# Altium PCB GPS SIM868-V10-ST-F0.PcbDoc (part 1 of 2)
Units mm, origin at the board's own origin, x right, y up, seen from the top; angles counter-clockwise.
Board outline 43.41 x 89 mm, 2 copper layers (Top Layer, Bottom Layer); 89 components, 73 nets, 330 pads, 120 vias.
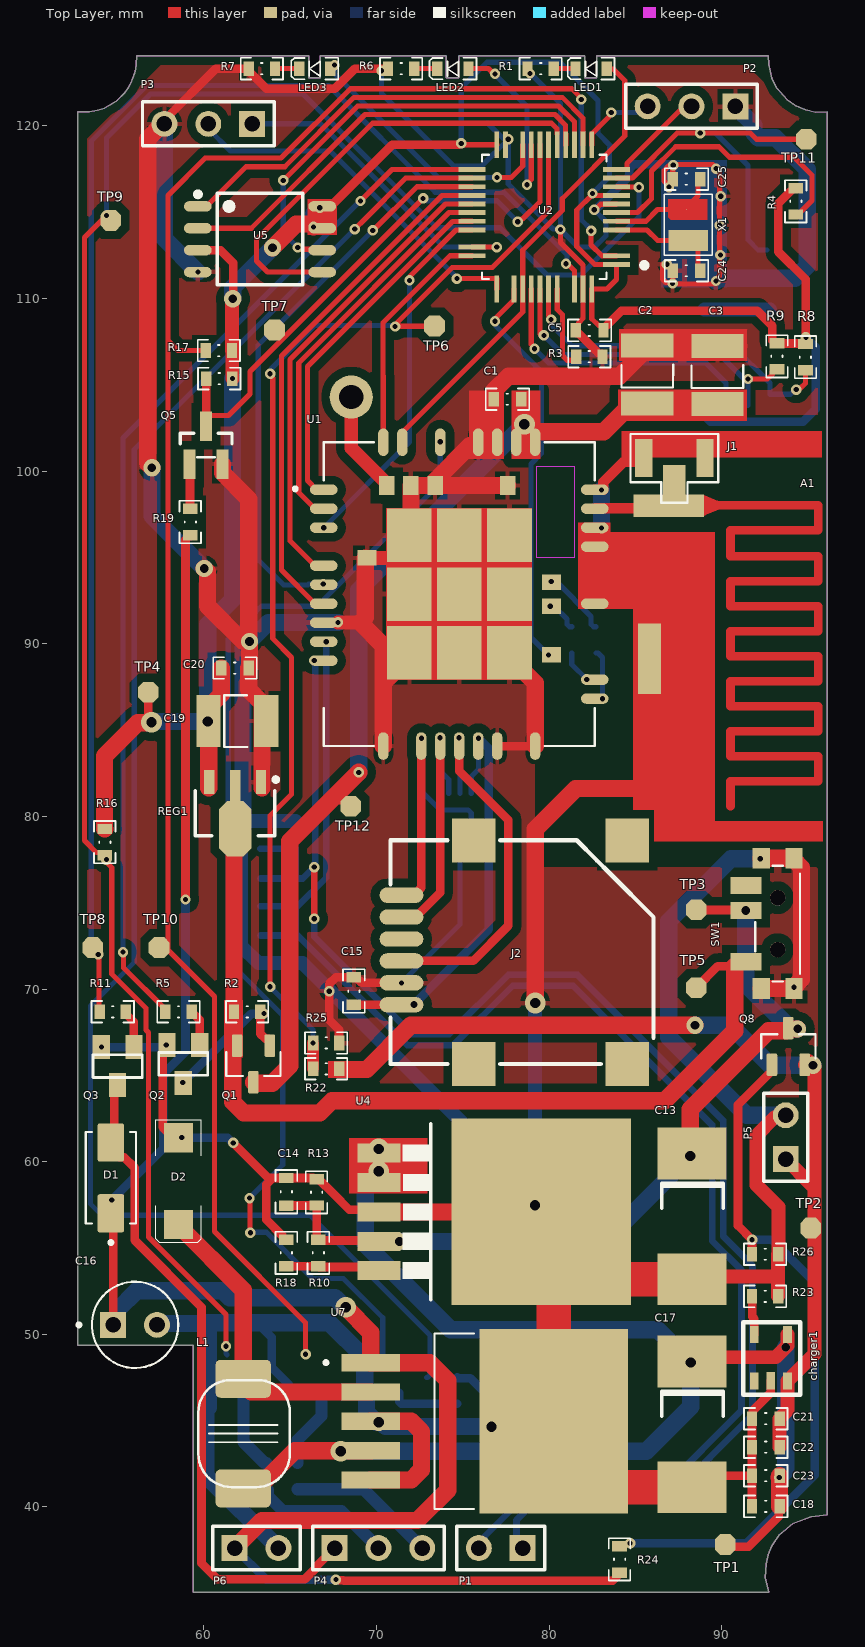
[diagram p0: Top Layer view]
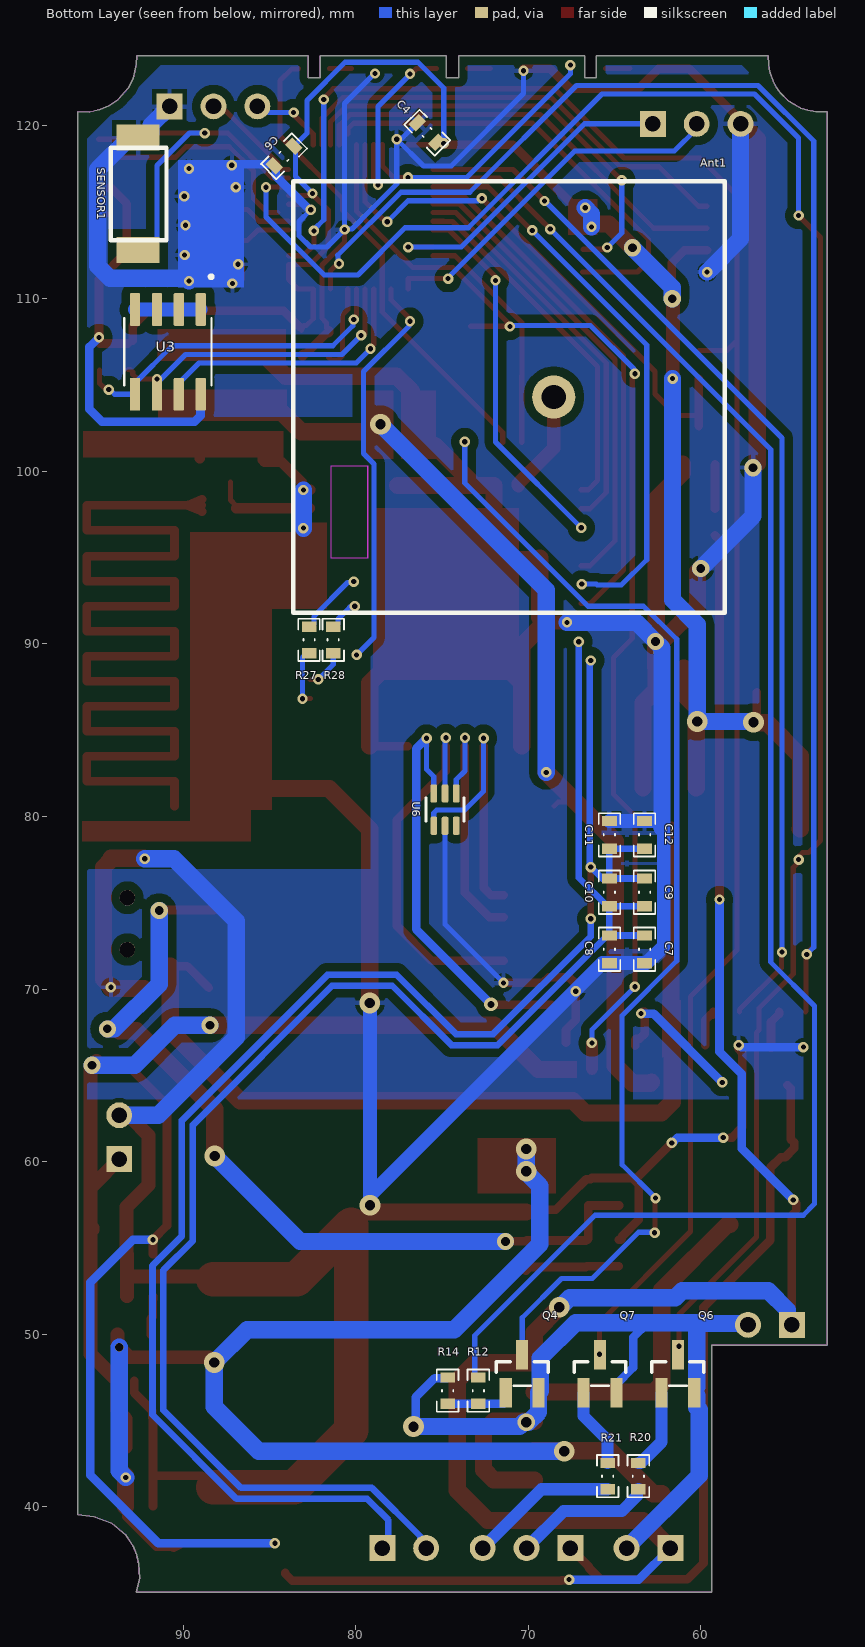
[diagram p1: Bottom Layer view, seen from below]
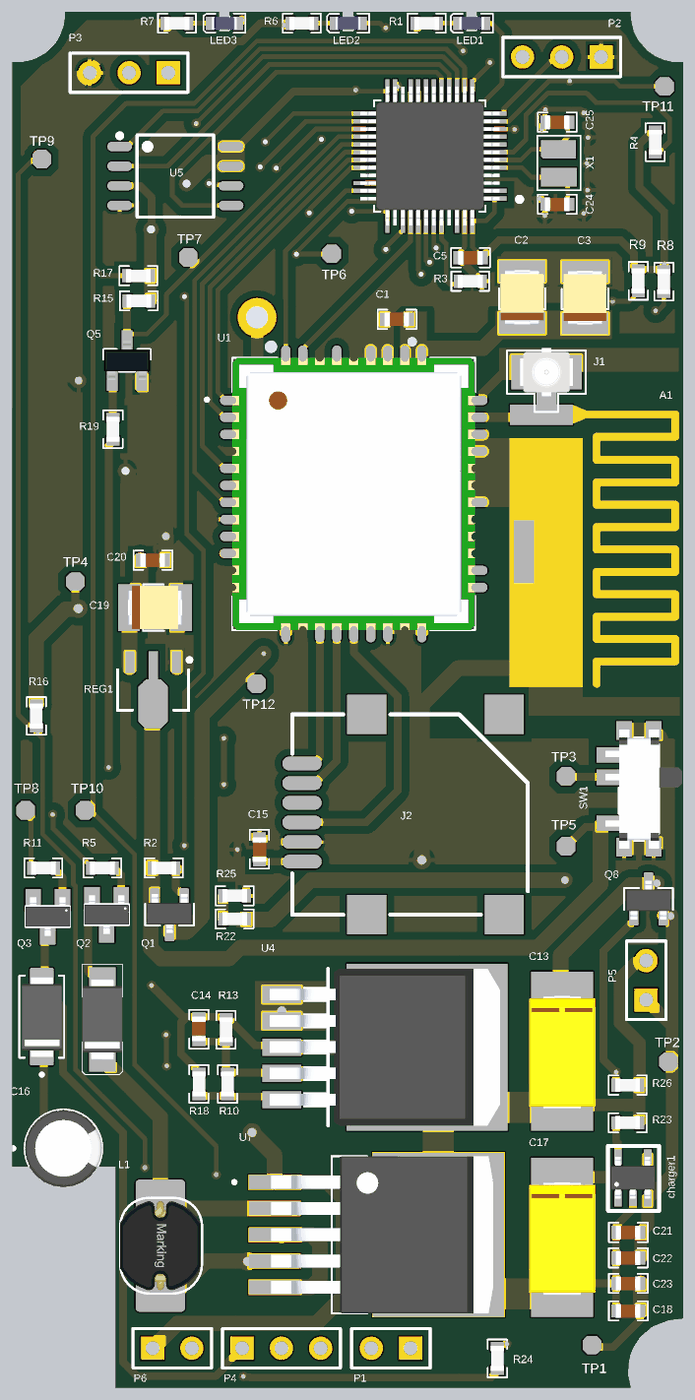
[diagram p3: 3D render of the assembled board from above, using the file's embedded part models]
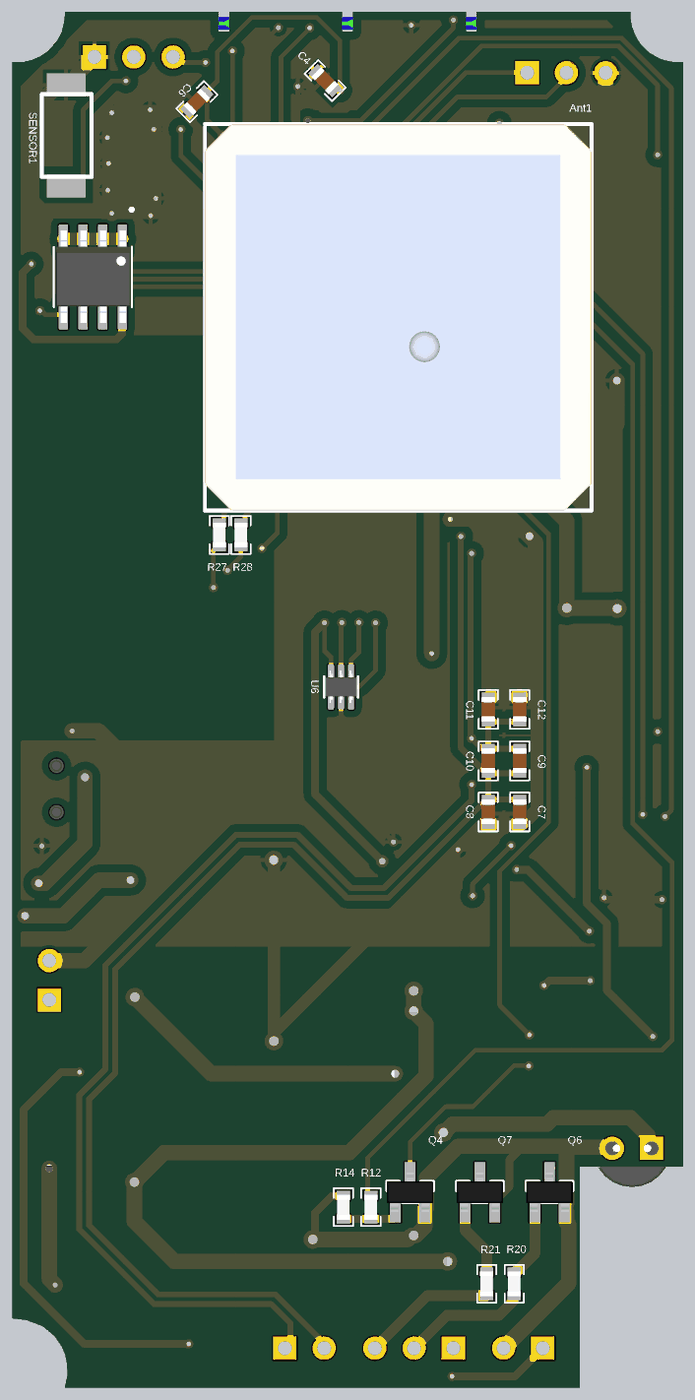
[diagram p4: 3D render of the assembled board from below, using the file's embedded part models]

## Layer stack, top to bottom
Top Solder: solder mask 0.0102, Solder Resist, Dk 3.5
Top Layer: signal copper 0.0356
Dielectric 1: dielectric 0.32, FR-4, Dk 4.8
Bottom Layer: signal copper 0.0356
Bottom Solder: solder mask 0.0102, Solder Resist, Dk 3.5

## Board outline
52.691,49.352 59.383,49.352 59.383,35.06 92.702,35.06 92.522,35.892 92.569,36.692 92.675,37.23 92.899,37.724 93.329,38.373 94.129,39.04 95.173,39.435 96.097,39.546 96.1,120.806 95.416,120.805 94.851,120.933 94.284,121.175 93.778,121.52 93.187,122.194 92.892,122.753 92.712,123.577 92.692,124.052 82.748,124.059 82.748,122.784 82.047,122.784 82.047,124.06 74.746,124.057 74.747,122.784 74.748,122.783 74.047,122.784 74.047,124.058 66.748,124.059 66.747,122.784 66.065,122.784 66.063,124.059 56.098,124.059 56.089,123.572 56.048,123.305 55.999,123.067 55.77,122.477 55.59,122.158 55.385,121.886 54.981,121.493 54.814,121.36 54.23,121.034 53.812,120.897 53.353,120.813 52.699,120.808

## Design rules (kind name [scope] priority, off if disabled: settings)
Clearance [All] p1: gap=0.2 ignorepadtopadclearanceinfootprint=FALSE
DiffPairsRouting [All] p1: maxlimit=0.254 minlimit=0.254 mostfreqgap=0.254 toplayer_minwidth=0.381 toplayer_maxwidth=0.381 toplayer_prefwidth=0.381 bottomlayer_minwidth=0.381 bottomlayer_maxwidth=0.381 bottomlayer_prefwidth=0.381 maxuncoupledlength=12.7
PolygonConnect [All] p1: connectstyle=Relief reliefconductorwidth=0.254 reliefentries=4 polygonreliefangle="90 Angle" airgapwidth=0.254
RoutingVias [All] p1: holewidth=0.3 width=0.6 viastyle="Through Hole" minholewidth=0.3 minwidth=0.6 maxholewidth=0.3 maxwidth=0.6
SolderMaskExpansion [All] p1: expansion=0.102 istentingtop=FALSE
Width [All] p1: maxlimit=2 minlimit=0.3 preferedwidth=0.5
29 further rules are at their usual default settings.

## Classes and differential pairs
differential pair MIC: +MIC_P -MIC_N

## Components (designator, comment, footprint, x,y, rotation, side; value= is the part's Value field where it differs from the comment)
A1 "ANTEN" "anten GSM" 86.919,97.993 r270 top
Ant1 "GPS Antenna" GPS-ANT 68.529,104.292 r90 bottom locked
C1 "100nF" CAP-0603 77.597,104.14 r0 top
C2 "220uF" TANTAL220uF-SMB 85.678,105.599 r90 top
C3 "220uF" TANTAL220uF-SMB 89.742,105.573 r90 top
C4 "100nF" CAP-0603 75.87,119.583 r225 bottom
C5 "100nF" CAP-0603 82.353,108.128 r0 top
C6 "100nF" CAP-0603 84.125,118.237 r135 bottom
C7 "10pF" CAP-0603 63.297,72.288 r270 bottom
C8 "33pF" CAP-0603 65.329,72.288 r270 bottom
C9 "10pF" CAP-0603 63.297,75.59 r270 bottom
C10 "33pF" CAP-0603 65.329,75.59 r270 bottom
C11 "10pF" CAP-0603 65.329,78.918 r270 bottom
C12 "33pF" CAP-0603 63.297,78.918 r270 bottom
C13 "470uF" 470uF-10V-TANTAL-D 88.265,56.746 r270 top
C14 "100nF" CAP-0603 64.745,58.242 r270 top
C15 "100nF" CAP-0603 68.707,69.901 r90 top
C16 "100uF-50V" CAP100uF-50V 56.007,50.546 r0 top
C17 "470uF" 470uF-10V-TANTAL-D 88.265,44.696 r270 top
C18 "100nF" CAP-0603 92.557,40.005 r0 top
C19 "220uF" TANTAL220uF-SMB 61.932,85.518 r0 top
C20 "100nF" CAP-0603 61.805,88.566 r0 top
C21 "4.7uf" CAP-0603 92.557,45.085 r0 top
C22 "4.7uf" CAP-0603 92.557,43.434 r0 top
C23 "4.7uf" CAP-0603 92.557,41.783 r0 top
C24 "10pF" CAP-0603 87.966,111.582 r0 top
C25 "10pF" CAP-0603 87.966,116.891 r0 top
charger1 "MCP73831TACIOT" MCP73831TACIOT 92.837,48.641 r270 top
D1 "M7" "M7 SMA" 54.61,59.055 r90 top
D2 "SS34A" SS34A 58.522,58.877 r90 top
J1 "uFL GPS" UFL 87.249,100.051 r0 top
J2 "JAE_SIM_Card_SF72S006" "SIM HOLDER" 77.978,72.136 r0 top locked
L1 "100uH" INDUCTOR100uH-5*5 62.272,44.247 r0 top
LED1 "RED" LED-0603 82.423,123.317 r270 top
LED2 "Blue" LED-0603 74.422,123.317 r270 top
LED3 "GREEN" LED-0603 66.421,123.317 r270 top
P1 "Header 2" HDR1X2 78.461,37.617 r180 top
P2 "Header 3" HDR1X3 90.78,121.133 r180 top
P3 "Header 3" HDR1X3 62.789,120.117 r180 top
P4 "Header 3" HDR1X3 67.564,37.617 r0 top
P5 "BATT" HDR1X2 93.701,60.147 r90 top
P6 "INPUT" HDR1X2 61.773,37.617 r0 top
Q1 "P-Channel360" FDN360P 62.865,65.659 r180 top
Q2 "MMBT2222A" MMBT2222A 58.801,65.659 r180 top
Q3 "MMBT2222A" MMBT2222A 54.991,65.532 r180 top
Q4 "S8050" S8050 70.358,47.709 r180 bottom
Q5 "S8050" S8050 60.122,101.498 r0 top
Q6 "S8050" S8050 61.341,47.709 r180 bottom
Q7 "S8050" S8050 65.847,47.709 r180 bottom
Q8 "P-Channel360" FDN360P 93.853,66.675 r0 top
R1 "1K" "RES SMD 0603" 79.502,123.317 r0 top
R2 "10K" "RES SMD 0603" 62.501,68.682 r0 top
R3 "10K" "RES SMD 0603" 82.321,106.629 r180 top
R4 "1K" "RES SMD 0603" 94.284,115.627 r90 top
R5 "10K" "RES SMD 0603" 58.524,68.682 r0 top
R6 "1K" "RES SMD 0603" 71.425,123.317 r180 top
R7 "1K" "RES SMD 0603" 63.348,123.317 r180 top
R8 "1K" "RES SMD 0603" 94.844,106.604 r90 top
R9 "1K" "RES SMD 0603" 93.193,106.655 r90 top
R10 "100K" "RES SMD 0603" 66.624,54.712 r270 top
R11 "1K" "RES SMD 0603" 54.714,68.682 r0 top
R12 "1k" "RES SMD 0603" 72.898,46.736 r270 bottom
R13 "1K" "RES SMD 0603" 66.523,58.223 r90 top
R14 "10K" "RES SMD 0603" 74.676,46.736 r270 bottom
R15 "3K" "RES SMD 0603" 60.884,105.359 r0 top
R16 "3K" "RES SMD 0603" 54.254,78.511 r90 top
R17 "3K" "RES SMD 0603" 60.858,106.985 r0 top
R18 "47K" "RES SMD 0603" 64.77,54.712 r90 top
R19 "10K" "RES SMD 0603" 59.207,97.053 r90 top
R20 "10K" "RES SMD 0603" 63.627,41.783 r90 bottom
R21 "10K" "RES SMD 0603" 65.405,41.783 r90 bottom
R22 "2.2K" "RES SMD 0603" 67.081,65.38 r180 top
R23 "4.7K" "RES SMD 0603" 92.507,52.197 r180 top
R24 "0R" "RES SMD 0603" 84.074,36.957 r270 top
R25 "3.3K" "RES SMD 0603" 67.081,66.878 r0 top
R26 "47K" "RES SMD 0603" 92.507,54.635 r180 top
R27 "0ohm" "RES SMD 0603" 82.702,90.221 r270 bottom
R28 "0ohm" "RES SMD 0603" 81.305,90.221 r270 bottom
REG1 "CA33" SOT89N 61.805,80.184 r270 top
SENSOR1 "BL2500N" SENSOR 92.608,116.078 r90 bottom
SW1 "PCM12SMTR" PCM12SMTR 92.837,73.787 r90 top
U1 "SIM868" SIM868 74.787,92.874 r0 top locked
U2 "STM32F030C8T6" STM32F030C8T6 79.71,114.7 r180 top locked
U3 "AT24C08C-SSHM-B" AT24C08C-SSHM-B 90.881,106.909 r270 bottom locked
U4 "MIC29302WU" MIC29302WU 74.376,57.09 r270 top
U5 "W25Q32BVSSIG" W25Q32BVSSIG 63.246,113.436 r0 top locked
U6 "SMF05CT1" SMF05CT1 74.828,80.391 r90 bottom
U7 "LM2576S-5.0" LM2576S-5.0 80.289,44.933 r0 top locked
X1 "NX3225GD 8MHZ" "NX3225GD 8MHZ" 88.021,114.259 r90 top

## Footprints (in the part's own frame and the unit in brackets; to place one, negate y for a bottom-side part, rotate by r counter-clockwise, add the part's x,y. Pads: shape width x height; smd on the part's side, far side on the other; paste and mask are expansions set on the pad)
470uF-10V-TANTAL-D [mm]
  rect 3x4 smd: 1(-3.734,0) 2(3.556,0)
  silkscreen extent -2.01,-1.75 -0.55,1.8, body extent -3.65,-2.15 3.65,2.15, height 3.11
"anten GSM" [mil]
  rect 52x160 smd: 1(0,0)
  rect 160x52 smd: 2(349,-44)
  Top Layer region: 60,-81.01 694,-81.01 694,105.99 60,105.99
  Top Layer lines w20: 13,78 0,109 ; -15,78 -2,109 ; -1,79 -1,341 56,341 56,141 115,141 115,341 172,341 172,141 229,141 229,341 286,341 286,141 343,141 343,341 400,341 400,141 457,141 457,341 514,341 514,141 571,141 571,341 628,341 628,141 685,141
AT24C08C-SSHM-B [mm]
  rrect25% 1.9x0.6 smd: 1(-2.455,1.905) 2(-2.455,0.635) 3(-2.455,-0.635) 4(-2.455,-1.905) 5(2.455,-1.905) 6(2.455,-0.635) 7(2.455,0.635) 8(2.455,1.905)
  silkscreen extent -4.45,-2.52 1.95,2.6, body extent -3.03,-2.42 2.97,2.48, height 1.75
CAP100uF-50V [mm]
  round 1.5 hole 0.9: N(1.27,0)
  rect 1.5x1.5 hole 0.9: P(-1.27,0)
  silkscreen extent -3.35,-2.5 2.5,2.5, body extent -2.49,-2.5 2.5,2.5, height 11
CAP-0603 [mm]
  rect 0.6x0.85 smd: 1(0.787,0.025) 2(-0.813,0.025)
  silkscreen extent -1.27,-0.6 1.24,0.65, body extent -0.83,-0.43 0.77,0.47, height 0.82
FDN360P [mm]
  rrect25% 0.61x1.3 smd: 1(-0.95,-1.06) 2(0.95,-1.06) 3(0,1.06)
  silkscreen extent -1.58,-0.7 1.58,0.7, body extent -1.46,-1.33 1.46,1.18, height 1.12
GPS-ANT [mm]
  round 2.5 hole 1.4: 1(0,0)
  silkscreen extent -12.5,-9.9 12.5,15.1, body extent -12.5,-9.9 12.5,15.1, height 4.5
HDR1X2 [mm] "Connector; Header; 2 Position"
  rect 1.5x1.5 hole 0.9: 1(0,0)
  round 1.5 hole 0.9: 2(2.54,0)
  silkscreen extent -1.27,-1.27 3.81,1.27
HDR1X3 [mm] "Connector; Header; 3 Position"
  rect 1.5x1.5 hole 0.9: 1(0,0)
  round 1.5 hole 0.9: 2(2.54,0) 3(5.08,0)
  silkscreen extent -1.27,-1.27 6.35,1.27
INDUCTOR100uH-5*5 [mm]
  round 0.508 on Mech15: 0(0,0)
  rrect25% 3.2x2.2 smd: 1(0,3.175) 2(0,-3.175)
  silkscreen extent -2.6,-3.1 2.7,3.1, body extent -2.6,-2.89 2.6,2.9, height 4.5
LED-0603 [mm]
  rect 0.85x0.6 smd: 1(0,0.902) 2(0,-0.902)
  silkscreen extent -0.63,-1.36 0.62,1.36, body extent -0.39,-0.81 0.41,0.79, height 0.81
LM2576S-5.0 [mm]
  rect 3.4x1 smd paste-0.05 mask+0.07: 1(-10.625,3.425) 2(-10.625,1.725) 3(-10.625,0.025) 4(-10.625,-1.675) 5(-10.625,-3.375)
  rect 8.6x10.7 smd paste-0.05 mask+0.07: 6(-0.025,0.025)
  silkscreen extent -13.33,-5.05 -4.65,5.11, body extent -10.85,-5.05 3.51,5.11, height 4.75
"M7 SMA" [mm]
  rrect15% 2.21x1.53 smd: A(2.054,0.004) C(-2.046,0.004)
  silkscreen extent -3.84,-1.45 2.65,1.45, body extent -2.62,-1.31 2.57,1.3, height 2.2
MCP73831TACIOT [mm]
  rect 1x0.5 smd: 1(1.346,-0.965) 2(1.338,0) 3(1.346,0.965) 4(-1.346,0.965) 5(-1.346,-0.965)
  silkscreen extent -2.06,-1.6 2.14,1.7, body extent -1.35,-1.45 1.35,1.45, height 1.46
MIC29302WU [mm]
  rect 1.1x2.5 smd: 1(-3.404,-4.242) 2(-1.702,-4.242) 3(0,-4.242) 4(1.702,-4.242) 5(3.404,-4.242)
  rect 10.8x10.41 smd: 6(0,5.156)
  silkscreen extent -5.09,-2.85 5.09,-1.17, body extent -5.08,-5.04 5.08,9.87, height 5.09
MMBT2222A [mm]
  rect 1x1.4 smd: 1(-0.95,-1.1) 2(0.95,-1.1) 3(0,1.1)
  silkscreen extent -1.42,-0.66 1.42,0.66, body extent -1.45,-1.25 1.45,1.25, height 1.1
"NX3225GD 8MHZ" [mm]
  round 0.025 smd: 1(0.9,0.055)
  rect 1.2x2.3 smd: 2(-0.898,-0.033)
  Top Layer region: 1.5,-1.138 0.3,-1.138 0.3,0.978 0.438,1.116 1.5,1.117
  silkscreen extent -1.75,-1.43 1.79,1.36
PCM12SMTR [mm]
  rect 1x1.8 smd: 1(-2.21,1.448) 2(0.762,1.448) 3(2.21,1.448)
  rect 1.2x1 smd: S1(-3.759,0.559) S2(-3.759,-1.346) S3(3.785,-1.346) S4(3.785,0.559)
  round 0.9 hole 0.9 unplated: ""(-1.5,-0.392) ""(1.5,-0.392)
  silkscreen extent -3.35,-1.69 3.35,0.91, body extent -3.86,-3.2 3.86,1.78, height 1.41
"RES SMD 0603" [mm]
  rect 0.6x0.85 smd: 1(0.762,0) 2(-0.762,0)
  silkscreen extent -1.22,-0.62 1.23,0.63, body extent -0.8,-0.43 0.8,0.43, height 0.48
S8050 [mm]
  rect 0.7x1.7 smd: 1(-0.95,-1.1) 2(0.95,-1.1) 3(0,1.1)
  silkscreen extent -1.5,-0.7 1.5,0.7, body extent -1.5,-1.27 1.5,1.27, height 1.1
SENSOR [mm]
  rect 1.5x2.5 smd mask+0: 1(-3.277,0) 2(3.238,0)
  silkscreen extent -2.7,-1.64 2.66,1.58
SIM868 [mm]
  oval 1.6x0.6 smd: 1(-7.85,6.05) 2(-7.85,4.95) 3(-7.85,3.85) 5(-7.85,1.65) 6(-7.85,0.55) 7(-7.85,-0.55) 8(-7.85,-1.65) 9(-7.85,-2.75) 10(-7.85,-3.85) 22(7.85,-6.05) 23(7.85,-4.95) 27(7.85,-0.55) 30(7.85,2.75) 31(7.85,3.85) 32(7.85,4.95) 33(7.85,6.05)
  oval 0.6x1.6 smd: 13(-4.4,-8.8) 15(-2.2,-8.8) 16(-1.1,-8.8) 17(0,-8.8) 18(1.1,-8.8) 19(2.2,-8.8) 21(4.4,-8.8) 34(4.4,8.8) 35(3.3,8.8) 36(2.2,8.8) 37(1.1,8.8) 39(-1.1,8.8) 41(-3.3,8.8) 42(-4.4,8.8)
  rect 1.1x0.9 smd paste-2: 45(-5.35,2.1) 59(5.35,-3.5) 61(5.35,-0.7) 62(5.35,0.7)
  rect 0.9x1.1 smd paste-2: 63(2.8,6.3) 66(-1.4,6.3) 67(-2.8,6.3) 68(-4.2,6.3)
  rect 2.6x3.1 smd paste-3: 69(-2.9,3.4) 70(-2.9,0) 71(-2.9,-3.4) 72(0,-3.4) 73(2.9,-3.4) 74(2.9,0) 75(2.9,3.4) 76(0,3.4) 77(0,0)
  Keep-Out Layer region: 6.65,2.102 4.504,2.102 4.504,7.4 6.65,7.4
  Keep-Out Layer region: 6.65,2.101 4.502,2.101 4.502,7.4 6.65,7.4
  silkscreen extent -9.6,-8.8 7.85,8.8, body extent -7.85,-8.8 7.85,8.8, height 2.6
"SIM HOLDER" [mil]
  oval 100x35 smd: 1(-257.5,-120) 2(-257.5,-20) 3(-257.5,80) 4(-257.5,-70) 5(-257.5,30) 6(-257.5,130)
  rect 100x100 smd: ""(-92.5,-255) ""(-92.5,255) ""(257.5,-255) ""(257.5,255)
  silkscreen extent -282,-255 318,255
SMF05CT1 [mm]
  rrect50% 1.06x0.39 smd: 1(-0.935,0.65) 2(-0.935,0) 3(-0.935,-0.65) 4(0.935,-0.65) 5(0.935,0) 6(0.935,0.65)
  silkscreen extent -0.68,-1.1 0.68,1.1, body extent -1.05,-1 1.05,1, height 1
SOT89N [mm] "SOT89, 3-Leads, Body 4.5x2.4 mm, Pitch 1.5mm, Lead Span 4.1mm, IPC Medium Density"
  rect 1.4x0.6 smd: 1(-1.8,1.5) 3(-1.8,-1.5)
  rect 1.8x0.6 smd: 2(-1.6,0)
  oct 3.2x1.9 smd: 2(0.9,0)
  silkscreen extent -2.07,-2.3 1.3,2.48, body extent -1.3,-2.3 1.3,2.3, height 1.6
SS34A [mm]
  rect 1.7x1.7 smd: 1(2.515,0) 2(-2.515,0)
  silkscreen extent -3.56,-1.32 3.56,1.32, body extent -2.59,-1.3 2.6,1.31, height 2.2
STM32F030C8T6 [mm]
  rect 1.56x0.28 smd: 1(-4.18,2.725) 2(-4.18,2.225) 5(-4.18,0.725) 6(-4.18,0.225) 7(-4.18,-0.275) 8(-4.18,-0.775) 9(-4.18,-1.275) 10(-4.18,-1.775) 11(-4.18,-2.275) 12(-4.18,-2.775) 25(4.18,-2.775) 26(4.18,-2.275) 27(4.18,-1.775) 28(4.18,-1.275) 29(4.18,-0.775) 30(4.18,-0.275) 31(4.18,0.225) 32(4.18,0.725) 34(4.18,1.725) 35(4.18,2.225)
  rect 0.28x1.56 smd: 13(-2.75,-4.205) 14(-2.25,-4.205) 15(-1.75,-4.205) 16(-1.25,-4.205) 17(-0.75,-4.205) 18(-0.25,-4.205) 19(0.25,-4.205) 20(0.75,-4.205) 21(1.25,-4.205) 23(2.25,-4.205) 24(2.75,-4.205) 37(2.75,4.155) 39(1.75,4.155) 40(1.25,4.155) 41(0.75,4.155) 42(0.25,4.155) 43(-0.25,4.155) 44(-0.75,4.155) 46(-1.75,4.155) 47(-2.25,4.155) 48(-2.75,4.155)
  silkscreen extent -5.95,-3.63 3.6,3.57, body extent -4.5,-4.53 4.5,4.47, height 1.61
TANTAL220uF-SMB [mm]
  rect 1.4x3.02 smd: 1(-1.676,0) 2(1.676,0)
  silkscreen extent -0.76,-1.5 0.58,1.5, body extent -1.75,-1.4 1.75,1.4, height 2.11
UFL [mm]
  rect 1x2.2 smd: 1(-1.778,0.699) 2(1.778,0.699)
  rect 1.3x2 smd: 3(0,-0.699)
  silkscreen extent -2.54,-1.88 2.54,2.1, body extent -1.7,-0.85 1.7,2.25, height 1.25
W25Q32BVSSIG [mm]
  oval 1.6x0.6 smd: 1(-3.6,1.905) 2(-3.6,0.635) 3(-3.6,-0.635) 4(-3.6,-1.905) 5(3.6,-1.905) 6(3.6,-0.635) 7(3.6,0.635) 8(3.6,1.905)
  silkscreen extent -3.82,-2.65 2.47,2.82

## Part data
A1: "ANTEN PCB 850-1900 MHz", LatestRevisionDate=17-Jul-2002, LatestRevisionNote="Re-released for DXP Platform.", Publisher="Altium Limited"
Ant1: library part GPSANTENNA
C1 C4 C5 C6 C7 C8 C9 C10 C11 C12 C14 C15 C18 C20 C21 C22 C23 C24 C25: library part CAP-0603
C2 C3 C19: library part TANTALIUM220uFSMB, "TLNT227M010R1300      SIZE-B 10V"
C13 C17: library part "TANTAL-D 470uF 10V", "TANTAL-D 470uF 10V"
C16: library part CAP100uF-50V, "Aluminum Electrolytic Capacitors Radial"
D1: "Standard Recovery Rectifier , DO-214AC/SMA, 1000V, 1.00A", Manufacturer=Diotec, Supplier Part Number 1=637-M7, Category="Rectifier Diodes", Manufacturer Part Number=M7, Packaging="Tape and Reel", Pricing 1="1=0.30000, 10=0.10000, 50=0.10000, 100=0.07200, 1000=0.05000, 10000=0.03600 (USD)", RoHS=Yes, RoHS Compliant=Yes, Stock 1=13841, Supplier 1=Mouser
D2: "MULTICOMP   SS34A   SCHOTTKY DIODE, 3A, 40V, SMA, FULL REEL", Case/Package=DO-214AC, Forward Current=3A, Forward Voltage=500mV, Manufacturer=Multicomp, Max Forward Surge Current (Ifsm)=80A, Max Operating Temperature=125°C, Max Repetitive Reverse Voltage (Vrrm)=40V, Min Operating Temperature=-55°C, Supplier Part Number 1=2101195, Category="Rectifier Diodes", ComponentLink1Description=https://datasheet.ciiva.com/7962/315950-7962304.pdf?src-supplier=Element14, ComponentLink1URL=https://datasheet.ciiva.com/7962/315950-7962304.pdf?src-supplier=Element14, ComponentLink2Description=https://datasheet.ciiva.com/7962/1772677-7962215.pdf?src-supplier=Element14, ComponentLink2URL=https://datasheet.ciiva.com/7962/1772677-7962215.pdf?src-supplier=Element14, Element Configuration=Single, Manufacturer Part Number=SS34A, Number of Pins=2, Packaging="Tape and Reel", Pricing 1="5=0.32700, 10=0.26200, 100=0.18700, 500=0.13100 (GBP)", RoHS=Yes, Stock 1=39585, Supplier 1=Farnell
J1: library part ANTENNA_U.FL
J2: LCSC=C410356
L1: library part inductor101-100uH, "inductor101-100uH"
LED1 LED2 LED3: library part "LED 0603"
P1: "Header, 2-Pin", LatestRevisionDate=17-Jul-2002, LatestRevisionNote="Re-released for DXP Platform.", Publisher="Altium Limited"
P2 P3 P4: "Header, 3-Pin", LatestRevisionDate=17-Jul-2002, LatestRevisionNote="Re-released for DXP Platform.", Publisher="Altium Limited"
P5 P6: library part "Header 2", "Header, 2-Pin", LatestRevisionDate=17-Jul-2002, LatestRevisionNote="Re-released for DXP Platform.", Publisher="Altium Limited"
Q1 Q8: library part FDN360P, "SOT-23"
Q2 Q3: "Trans GP BJT NPN 40V 0.6A 250mW Automotive 3-Pin SOT-23 T/R", Case/Package=SOT-23, Collector Base Voltage (VCBO)=75V, Collector Emitter Breakdown Voltage=40V, Collector Emitter Saturation Voltage=1V, Current Rating=500mA, Emitter Base Voltage (VEBO)=6V, Frequency=300MHz, Manufacturer="ON Semiconductor / Fairchild", Max Collector Current=1A, Max Operating Temperature=150°C, Max Power Dissipation=350mW, Min Operating Temperature=-55°C, Package Quantity=3000, Supplier Part Number 1=18C7400, Category=Uncategorized, Collector Emitter Voltage (VCEO)=40V, Collector-emitter Voltage-Max=1V, ComponentLink1Description=https://datasheet.ciiva.com/7972/24696-7972792.pdf?src-supplier=Element14, ComponentLink1URL=https://datasheet.ciiva.com/7972/24696-7972792.pdf?src-supplier=Element14, ComponentLink2Description=https://datasheet.ciiva.com/22748/1842966-22748582.pdf?src-supplier=Element14, ComponentLink2URL=https://datasheet.ciiva.com/22748/1842966-22748582.pdf?src-supplier=Element14, ComponentLink3Description=https://datasheet.ciiva.com/7972/1842966-7972791.pdf?src-supplier=Element14, ComponentLink3URL=https://datasheet.ciiva.com/7972/1842966-7972791.pdf?src-supplier=Element14, ComponentLink4Description=https://datasheet.ciiva.com/7972/1842966-7972790.pdf?src-supplier=Element14, ComponentLink4URL=https://datasheet.ciiva.com/7972/1842966-7972790.pdf?src-supplier=Element14, ComponentLink5Description=https://datasheet.ciiva.com/11201/pn2222a-11201854.pdf?src-supplier=Avnet, ComponentLink5URL=https://datasheet.ciiva.com/11201/pn2222a-11201854.pdf?src-supplier=Avnet, ComponentLink6Description=https://datasheet.ciiva.com/971/mmbt2222a-971899.pdf?src-supplier=Digi-Key, ComponentLink6URL=https://datasheet.ciiva.com/971/mmbt2222a-971899.pdf?src-supplier=Digi-Key, ComponentLink7Description=https://datasheet.ciiva.com/971/mmbt2222a-971900.pdf?src-supplier=Digi-Key, ComponentLink7URL=https://datasheet.ciiva.com/971/mmbt2222a-971900.pdf?src-supplier=Digi-Key, Contact Plating=Tin,Matte, Element Configuration=Single, Gain Bandwidth Product=300MHz, hFE Min=100, Lead Free="Lead Free", Manufacturer Part Number=MMBT2222A, Max Breakdown Voltage=40V, Max Frequency=300MHz, Mount="Surface Mount", Number of Elements=1, Number of Pins=3, Packaging="Tape and Reel", Polarity=NPN, Power Dissipation=350mW, Pricing 1="1=0.23300, 10=0.19000, 100=0.07900, 500=0.06600, 18000=0.06600 (USD)", Radiation Hardening=No, Reach SVHC Compliant=Yes, RoHS=Yes, RoHS Compliant=Yes, Series=-, Supplier 1=Newark, Termination=SMD/SMT, Transition Frequency=300MHz, Voltage=40V, Voltage Rating (DC)=40V, Weight=0.002116oz
Q4 Q5 Q6 Q7: library part 3372-S8050TR-ND, "Bipolar (BJT) Transistor NPN 25 V 500 mA 150MHz 300 mW Surface Mount SOT-23"
R1 R2 R3 R4 R5 R6 R7 R8 R9 R10 R11 R12 R13 R14 R15 R16 R17 R18 R19 R20 R21 R22 R23 R24 R25 R26 R27 R28: library part "RES smd 0603"
SENSOR1: "BL-2500N Ultra-small SMT vibration sensor"
SW1: "Slide Switch SPDT Surface Mount, Right Angle"
U1: "Gsm/gprs + Gnss Module SIM868 S2-106R4-Z1Q6F-Z1Q6Q Simcom; 850/900/1800/1900MHZ", Manufacturer=Simcom, Manufacturer Part Number=SIM868, Pricing 1="50=15.50000, 100=14.50000, 200=13.50000, 300=13.00000, 400=12.50000, 500=12.50000, 5000=12.20000 (USD)", RoHS=No, Supplier 1=Avnet, Supplier Part Number 1=SIM868
U2: "ARM® Cortex®-M0 STM32 F0 Microcontroller IC 32-Bit 48MHz 64KB (64K x 8) FLASH", Case/Package=LQFP, Frequency=48MHz, Manufacturer=STMicroelectronics, Max Operating Temperature=85°C, Max Power Dissipation=364mW, Max Supply Voltage=3.6V, Min Operating Temperature=-40°C, Min Supply Voltage=2.4V, Package Quantity=250, Supplier Part Number 1=7925921, Category=Microcontrollers, ComponentLink1Description=https://datasheet.ciiva.com/28647/1792126-28647793.pdf?src-supplier=Element14, ComponentLink1URL=https://datasheet.ciiva.com/28647/1792126-28647793.pdf?src-supplier=Element14, ComponentLink2Description=https://datasheet.ciiva.com/29721/dm00088500-29721644.pdf?src-supplier=Digi-Key, ComponentLink2URL=https://datasheet.ciiva.com/29721/dm00088500-29721644.pdf?src-supplier=Digi-Key, ComponentLink3Description=https://datasheet.ciiva.com/29987/dm00088500-29987014.pdf?src-supplier=Avnet, ComponentLink3URL=https://datasheet.ciiva.com/29987/dm00088500-29987014.pdf?src-supplier=Avnet, Contact Plating=Tin,Matte, Core Architecture=ARM, Data Bus Width=32b, Height=1.45mm, Interface=I2C,SPI,UART,USART, Lead Free="Lead Free", Length=7.2mm, Manufacturer Part Number=STM32F030C8T6, Max Frequency=48MHz, Memory Size=64KB, Memory Type=FLASH, Number of ADC Channels=12, Number of I2C Channels=2, Number of I/Os=39, Number of Pins=48, Number of Programmable I/O=39, Number of PWM Channels=6, Number of SPI Channels=2, Number of Timers/Counters=7, Oscillator Type=Internal, Packaging=Tray, Peripherals=POR,PWM,WDT,DMA, Pricing 1="5=3.54600, 10=2.99000, 100=2.55600, 250=2.40800, 500=2.12000 (EUR)", Radiation Hardening=No, RAM Size=8KB, Reach SVHC Compliant=Yes, RoHS=Yes, RoHS Compliant=Yes, Series="STM32 F0", Stock 1=760, Supplier 1=Rs, Watchdog Timer=Yes, Width=7.2mm
U3: "EEPROM Memory IC 2Kb (256 x 8) I²C 1MHz 450ns 8-SOIC"
U5: "FLASH - NOR Memory IC 32Mb _4M x 8_ SPI - Quad I/O 104MHz 8-SOIC"
U6: "12.5V Clamp 8A (8/20Âµs) Ipp Tvs Diode Surface Mount SC-88/SC70-6/SOT-363"
U7: "SIMPLE SWITCHER® 40V, 3A Low Component Count Step-Down Regulator 5-DDPAK/TO-263 -40 to 125", Case/Package=TO-263-5, Manufacturer="TI National Semiconductor", Max Input Voltage=40V, Max Operating Temperature=125°C, Max Output Current=3A, Min Input Voltage=4V, Min Operating Temperature=-40°C, Output Voltage=5V, Package Quantity=45, Quiescent Current=5mA, Supplier Part Number 1=LM2576S-5.0-ND, Switching Frequency=58kHz, Category="Voltage Regulators - Switching", ComponentLink1Description=http://components.arrow.com/part/dataview/659311S2342416N1317?src-supplier=Arrow+Electronics, ComponentLink1URL=http://components.arrow.com/part/dataview/659311S2342416N1317?src-supplier=Arrow+Electronics, ComponentLink2Description=http://www.mouser.com/ds/2/405/snvs107c-317001.pdf?src-supplier=Mouser, ComponentLink2URL=http://www.mouser.com/ds/2/405/snvs107c-317001.pdf?src-supplier=Mouser, ComponentLink3Description=http://www.ti.com/lit/ds/symlink/lm2576hv.pdf?src-supplier=Digi-Key, ComponentLink3URL=http://www.ti.com/lit/ds/symlink/lm2576hv.pdf?src-supplier=Digi-Key, Efficiency=77%, Lead Free="Contains Lead", Manufacturer Part Number=LM2576S-5.0, Mount="Surface Mount", Number of Outputs=1, Number of Pins=5, Operating Supply Voltage=40V, Output Current=3A, Output Type=Fixed, Packaging=Rail/Tube, Pricing 1="135=4.61356 (USD)", Radiation Hardening=No, RoHS=No, RoHS Compliant=No, Series="SIMPLE SWITCHER®", Supplier 1=Digi-Key, Synchronous Rectifier=No
X1: library part NX3225GD-8MHZ-STD-CRA, "Crystal 8.0000MHZ 8PF SMD", Case/Package=SMD/SMT, ESR (Equivalent Series Resistance)=500R, Frequency=8MHz, Frequency Stability=150ppm, Frequency Tolerance=50ppm, Load Capacitance=8pF, Manufacturer=NDK, Manufacturer Part Number=NX3225GD-8MHZ-STD-CRA-3, Max Operating Temperature=150°C, Min Operating Temperature=-40°C, Package Quantity=3000, Supplier Part Number 1=1847983, Category=Crystals, ComponentLink1Description=https://datasheet.ciiva.com/6732/c-nx3225gd-std-cra-3-e-6732944.pdf?src-supplier=Digi-Key, ComponentLink1URL=https://datasheet.ciiva.com/6732/c-nx3225gd-std-cra-3-e-6732944.pdf?src-supplier=Digi-Key, Height=0.039inch, Length=0.126inch, Mount="Surface Mount", Number of Pins=2, Packaging="Tape and Reel", Pricing 1="5=1.51000, 25=1.40400, 50=1.31400, 100=1.25600, 200=1.22600 (GBP)", RoHS=Yes, Series="NX3225GD - Automotive", Stock 1=405, Supplier 1=Rs, Width=0.098inch

## Free pads (board coordinates)
  oct 1.2x1.2 smd: 13(53.557,72.402) 13(54.603,114.525) 13(56.769,87.198) 13(57.398,72.402) 13(64.084,108.179) 13(68.504,80.594) 13(73.355,108.407) 13(88.519,70.079) 13(88.519,74.6) 13(90.195,37.821) 13(94.894,119.228) 13(95.145,56.152)

## Via types
v1: diameter 0.6, hole 0.3, Top Layer to Bottom Layer, tented both sides, 95 vias
v2: diameter 1.2, hole 0.6, Top Layer to Bottom Layer, tented both sides, 12 vias
v3: diameter 1, hole 0.5, Top Layer to Bottom Layer, tented both sides, 10 vias
v4: diameter 0.5, hole 0.5, Top Layer to Bottom Layer, tented both sides, 1 vias
v5: diameter 0.8, hole 0.4, Top Layer to Bottom Layer, tented both sides, 1 vias
v6: diameter 1, hole 0.6, Top Layer to Bottom Layer, tented both sides, 1 vias

## Nets (pads, with @x,y where several pads share a name; then routed paths per layer and width w, separated by ;. In a path a pad name is that pad's centre, name@x,y a point inside that pad or via, vN(x,y) a via of type N, cw(c..) or ccw(c..) an arc to the next point about the centre after c; other vN are vias at no path point)
ACC: pad.13@57.398,72.402 Q7.3 R17.2 U2.2 | length 110
  Top Layer w0.3: R17.2@60.096,106.985 58.496,106.985 57.912,107.569 ; v1(65.888,48.844) 65.888,50.673 60.601,55.96 60.601,69.574 57.912,72.263 57.912,107.569 ; v1(81.853,121.528) 81.853,121.601 81.3,122.154 68.487,122.154 64.469,118.135 60.071,118.135 57.912,115.976 57.912,107.569 ; v1(82.423,113.919) 82.423,113.109 83.056,112.476 U2.2@83.89,112.476
  Bottom Layer w0.3: v1(81.853,121.528) 81.853,114.559 82.423,113.99 v1(82.423,113.919)
DCD: U1.5 U2.29 | length 27.3
  Top Layer w0.3: U1.5@66.937,94.524 66.437,94.524 64.989,95.971 64.989,106.471 73.994,115.476 U2.29@75.53,115.476
DTR: U1.6 U2.27 | length 33
  Top Layer w0.3: v1(69.774,113.944) 69.799,113.944 72.331,116.476 U2.27@75.53,116.476
  Bottom Layer w0.3: v1(66.906,93.454) 66.065,93.454 66.006,93.396 64.618,93.396 63.144,94.869 63.144,107.315 v1(69.774,113.944)
EEWP: U2.41 U3.7 | length 16.1
  Top Layer w0.3: U2.41@78.96,110.546 78.96,107.354 79.146,107.168 v1(79.146,107.086)
  Bottom Layer w0.3: v1(79.146,107.086) 79.969,106.264 89.086,106.264 90.246,105.104 U3.7@90.246,104.454
G_RXD: R28.1 U1.23 | length 2.4
  Top Layer w0.3: v1(82.169,87.935) 82.18,87.924 U1.23@82.637,87.924
  Bottom Layer w0.3: R28.1@81.305,89.459 81.305,88.807 82.169,87.943 v1(82.169,87.935)
G_TXD: R27.1 U1.22 | length 3.3
  Top Layer w0.3: U1.22@82.637,86.824 83.077,86.824 v1(83.083,86.817)
  Bottom Layer w0.3: R27.1@82.702,89.459 82.827,89.459 83.083,89.203 v1(83.083,86.817)
GND: A1.2 C1.2 C2.2 C3.2 C4.2 C5.2 C6.2 C7.1 C8.1 C11.2 C12.2 C13.2 C14.2 C15.1 C16.N C17.2 C18.2 C19.2 C20.1 C21.2 C22.2 C23.2 C24.2 C25.2 charger1.2 D2.1 J1.1 J1.2 J2.4 P2.1 P3.3 P5.2 P6.2 Q2.2 Q3.2 Q4.2 Q5.2 Q6.2 Q7.2 R1.2 R3.2 R6.1 R7.1 R13.1 R14.2 R18.1 R23.2 R25.1 R26.2 REG1.1 SENSOR1.2 SW1.S1 SW1.S2 SW1.S3 SW1.S4 U1.8 U1.13 U1.19 U1.21 U1.27 U1.30 U1.31 U1.33 U1.36 U1.37 U1.45 U1.63 U1.66 U1.67 U1.69 U1.70 U1.71 U1.72 U1.73 U1.74 U1.75 U1.76 U1.77 U2.8 U2.23 U2.47 U4.3 U4.6 U5.4 U6.2 U7.3 U7.5 U7.6 | length 542
  Top Layer w0.3: v1(80.645,113.995) 80.661,113.98 80.661,113.245 81.96,111.945 U2.47@81.96,110.546 81.96,108.859 81.69,108.588 C5.2@81.69,108.303 ; v1(82.611,115.139) 82.639,115.139 82.965,115.466 83.88,115.466 U2.8@83.89,115.476 ; v1@86.554,111.985 86.554,111.139 86.764,110.928 87.09,110.928 v1(87.147,110.871) 87.15,110.874 87.15,111.605 C24.2@87.153,111.608 ; v1(86.941,116.456) 86.941,116.51 86.65,116.801 86.65,117.404 86.943,117.697 v1@87.15,117.697 ; v1@87.147,110.833 89.473,110.833 v1(89.659,111.018) 89.659,111.099 89.862,111.302 v1(89.862,114.246) 89.862,115.765 89.881,115.784 89.881,115.903 89.862,115.922 89.881,115.941 89.881,116.192 89.862,116.211 89.862,117.24 89.659,117.443 v1(89.659,117.525) ; v1@87.147,117.754 89.486,117.754 v1@89.687,117.553 ; v1@87.15,117.752 v1@87.15,117.697 ; C25.2@87.153,116.916 87.15,116.919 v1@87.15,117.697 ; v1(87.179,117.723) 87.153,117.697 v1@87.15,117.697
  Top Layer w0.5: P3.3@57.709,120.117 57.709,120.345 60.681,123.317 62.461,123.317 63.623,122.155 67.569,122.155 68.731,123.317 v1@70.282,123.317 ; Q2.2@57.851,66.559 57.607,66.315 57.607,61.992 58.207,61.392 D2.1@58.318,61.392 ; v1(61.697,61.087) 63.729,59.055 63.983,59.055 ; R18.1@64.77,55.474 64.645,55.474 64.595,55.524 64.595,55.649 63.602,56.642 63.602,58.674 63.983,59.055 ; R25.1@67.843,66.878 67.819,66.903 67.819,67.639 67.259,68.199 v1(67.259,69.875) 67.259,70.307 67.64,70.688 C15.1@68.682,70.688 68.807,70.688 69.137,70.358 v1(71.438,70.358) ; U4.3@70.134,57.09 70.019,57.205 68.427,57.205 67.495,58.137 66.648,58.985 R13.1@66.523,58.985 66.398,58.985 66.327,59.055 C14.2@64.77,59.055 63.983,59.055 ; U7.6@76.352,44.958 v2(76.657,44.653) ; U1.19@76.987,84.074 U1.21@79.187,84.074 ; U4.6@79.532,57.09 U4.6@80.264,56.358 ; C5.2@81.54,108.153 81.54,108.028 81.59,107.978 81.715,107.978 82.889,106.804 83.033,106.804 83.083,106.754 R3.2@83.083,106.629 ; U1.31@82.637,96.724 U1.30@82.637,95.624 U1.27@82.637,92.324 87.015,92.324 87.198,92.507 ; C17.2@88.265,41.14 88.934,41.808 C23.2@91.744,41.808 ; C18.2@91.744,40.03 C23.2@91.744,41.808 ; charger1.2@92.837,47.303 92.837,46.609 91.794,45.566 91.794,45.16 C21.2@91.744,45.11 C22.2@91.744,43.459 C23.2@91.744,41.808 ; R23.2@93.248,52.218 R23.2@93.269,52.197 ; R26.2@93.248,54.614 R26.2@93.269,54.635 R26.2@93.274,54.641
  Top Layer w0.6: U1.33@82.637,98.924 U1.33@83.033,98.924 ; v1(83.033,98.906) U1.33@83.033,98.924 ; J1.1@85.395,101.498 85.395,100.65 85.271,100.526 84.295,100.526 83.137,99.368 83.137,98.924 U1.33@83.033,98.924 ; J1.1@85.721,101.575 88.777,101.575 89.027,101.325 J1.2@89.027,100.749
  Top Layer w0.8: v1(67.761,91.237) 69.037,91.237 69.337,91.537 ; U1.45@69.337,94.974 U1.45@69.437,94.974 U1.69@70.837,94.974 ; C13.2@88.265,53.19 88.424,53.349 92.299,53.349 92.308,53.34 93.248,53.34 ; R23.2@93.248,52.218 93.248,53.34 ; R26.2@93.248,54.614 93.248,53.34 ; R26.2@93.274,54.641 93.274,57.373 91.999,58.649 91.999,61.519 93.033,62.553 93.567,62.553 P5.2@93.701,62.687
  Top Layer w1: v3(56.984,100.203) 56.744,100.443 56.744,119.245 57.615,120.117 P3.3@57.709,120.117 ; v3(60.02,94.361) 60.198,94.183 60.198,92.194 v3@62.257,90.135 ; Q5.2@61.072,100.398 61.072,99.898 62.593,98.378 62.593,90.177 v3(62.635,90.135) 62.635,88.634 C20.1@62.593,88.592 62.593,87.344 63.355,86.582 REG1.1@63.355,81.661 ; 69.037,91.237 70.387,89.887 70.387,87.724 ; 69.337,91.537 U1.45@69.337,94.974 ; U7.5@69.664,41.558 72.007,41.558 72.593,42.144 72.593,44.372 72.007,44.958 U7.3@69.664,44.958 ; U4.3@70.134,57.09 U4.6@79.172,57.09 ; U1.13@70.387,84.074 70.387,87.724 ; U1.77@74.787,92.874 U1.70@71.887,92.874 U1.71@71.887,89.474 ; U1.63@77.587,99.174 U1.66@73.387,99.174 ; v2(79.187,69.194) 79.187,79.263 81.534,81.61 84.871,81.61 ; U1.21@79.187,84.074 79.187,87.724 77.687,89.224 U1.73@77.687,89.474 ; C2.2@84.708,106.629 84.708,107.075 C2.2@85.631,107.075 ; 87.77,107.302 85.865,107.302 84.067,105.504 77.641,105.504 76.784,104.647 C1.2@76.784,104.165 76.682,104.165 75.971,103.455 75.971,102.285 75.887,102.201 U1.37@75.887,101.674 75.687,101.474 75.401,101.474 73.387,99.459 U1.66@73.387,99.174 ; SW1.S1@92.278,70.028 SW1.S2@94.183,70.028 ; SW1.S4@92.278,77.572 SW1.S3@94.183,77.572 94.183,77.472 94.615,77.04 94.615,70.56 94.183,70.128 v1(94.183,70.104) ; 70.387,87.724 71.887,89.224 U1.71@71.887,89.474 ; U1.71@71.887,89.474 U1.72@74.787,89.474 U1.73@77.687,89.474 ; U1.66@73.387,99.174 U1.67@71.987,99.174 71.987,96.374 U1.69@71.887,96.274 U1.76@74.787,96.274 U1.75@77.687,96.274 U1.74@77.687,92.874 U1.73@77.687,89.474
  Top Layer w2: C17.2@88.265,41.14 83.564,41.14 80.264,44.44 U7.6@80.264,44.958 80.264,56.358 83.432,53.19 C13.2@88.265,53.19
  Bottom Layer w0.3: v1(70.282,123.19) 70.282,121.869 74.469,117.682 76.077,117.682 v1(77.622,119.228) ; v1(71.438,70.358) 74.828,73.749 U6.2@74.828,79.456 ; C4.2@76.427,120.176 77.317,119.285 77.565,119.285 v1(77.622,119.228) ; v1(78.885,123.032) 78.915,123.032 80.645,121.303 v1(80.645,113.995) 81.661,112.979 82.626,112.979 83.287,113.64 83.287,114.463 v1(82.611,115.139) ; v1@80.607,114.034 80.223,114.034 79.17,115.086 77.622,116.634 v1(77.622,119.228)
  Bottom Layer w0.5: v1(54.066,66.634) 57.667,66.634 57.784,66.751 v1(57.811,66.751) ; v1(58.713,61.392) 61.365,61.392 61.67,61.087 v1(61.697,61.087) ; 63.068,50.673 63.932,49.809 63.932,48.074 64.897,47.109 Q7.2@64.897,46.609 ; R14.2@74.676,47.498 74.713,47.461 75.424,47.461 76.523,46.362 76.523,44.787 v2(76.657,44.653) ; v1@82.691,115.158 84.634,117.102 84.634,117.516 84.629,117.521 84.806,117.698 84.806,117.769 87.133,117.769 v1(87.179,117.723)
  Bottom Layer w0.8: 62.154,79.477 62.154,72.494 63.146,71.501 C7.1@63.271,71.501 C8.1@65.303,71.501 65.71,71.501 79.096,58.115 ; 62.254,79.348 62.636,79.731 C12.2@63.271,79.731 C11.2@65.303,79.731 ; v2(79.172,57.481) 79.172,69.009 79.187,69.024 v2(79.187,69.194)
  Bottom Layer w1: v3(56.984,100.203) 56.984,97.397 v3(60.02,94.361) ; C16.N@57.201,50.622 60.108,50.622 ; P3.3@57.709,120.117 57.709,113.469 v1(59.646,111.531) ; 60.146,50.675 60.175,50.673 63.068,50.673 67.259,50.673 69.308,48.624 69.308,46.709 Q4.2@69.408,46.609 69.408,45.493 69.994,44.907 v6(70.129,44.907) ; Q6.2@60.241,46.459 60.241,45.754 60.108,45.621 60.108,41.822 P6.2@64.313,37.617 ; Q6.2@60.241,46.959 60.241,47.464 60.241,50.673 ; 62.254,79.348 62.254,89.754 v3(62.635,90.135) 63.737,91.237 v1(67.761,91.237) ; v6@70.265,44.907 70.519,44.653 v2(76.657,44.653) ; v1(83.033,96.698) v1(83.033,98.906) ; v1(89.659,111.018) 89.816,111.176 94.234,111.176 94.945,111.887 94.945,117.48 93.108,119.316 SENSOR1.2@92.608,119.316 ; P2.1@90.78,121.133 91.858,120.054 91.858,119.566 92.108,119.316 SENSOR1.2@92.596,119.316 ; v1(92.227,77.546) 90.526,77.546 86.919,73.939 86.919,67.208 91.44,62.687 P5.2@93.701,62.687
  other v1: 86.814,111.985 89.913,112.519 89.938,115.922
GNSS_EN: U1.59 U2.39 | length 23.4
  Top Layer w0.3: v1(76.86,108.687) 76.918,108.744 76.918,108.883 77.96,109.926 U2.39@77.96,110.546
  Bottom Layer w0.3: v1(76.86,108.687) 76.918,108.629 76.918,108.396 79.542,105.771 79.542,101.02 78.941,100.419 78.941,90.365 v1(79.949,89.357)
IN4.2V: C13.1 C14.1 pad.13@88.519,74.6 Q8.3 R10.2 R13.2 SW1.2 U4.4 | length 49.9
  Top Layer w0.5: C14.1@64.74,57.461 R13.2@66.523,57.461 66.523,55.524 66.573,55.474 R10.2@66.624,55.474 66.667,55.431 70.091,55.431 U4.4@70.134,55.388 71.307,55.388 v3(71.323,55.372) ; pad.13@88.189,74.6 88.214,74.574 91.364,74.574 v3(91.389,74.549)
  Top Layer w1: v2(88.163,60.325) 88.163,63.043 92.706,67.585 93.703,67.585 Q8.3@93.853,67.735 93.897,67.691 v3(94.386,67.691)
  Bottom Layer w1: v3(71.323,55.372) 83.21,55.372 v2(88.163,60.325) ; v3(91.389,74.549) 91.389,70.282 93.98,67.691 v3(94.386,67.691)